# Altium PCB PCB1.PcbDoc
Units mm, origin at the board's own origin, x right, y up, seen from the top; angles counter-clockwise.
Board outline 54.1 x 17.02 mm, 2 copper layers (Top Layer, Bottom Layer); 28 components, 32 nets, 150 pads, 61 vias.
Unrouted connection lines stored in the file: 3.
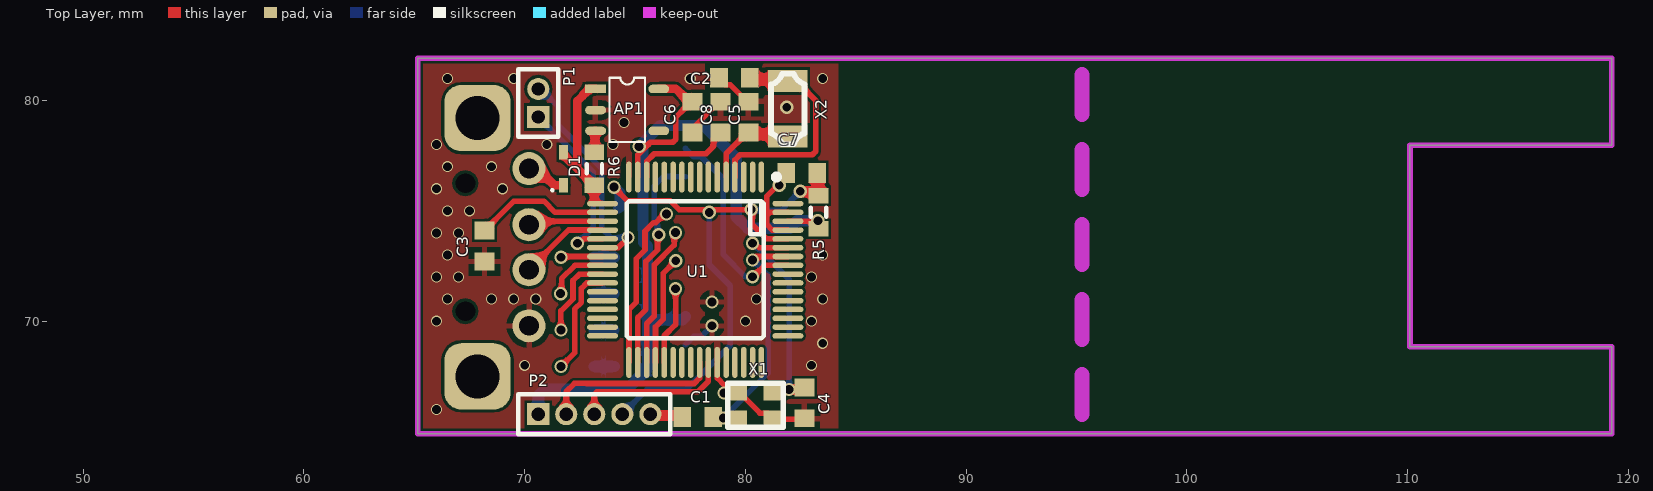
[diagram p0: Top Layer view]
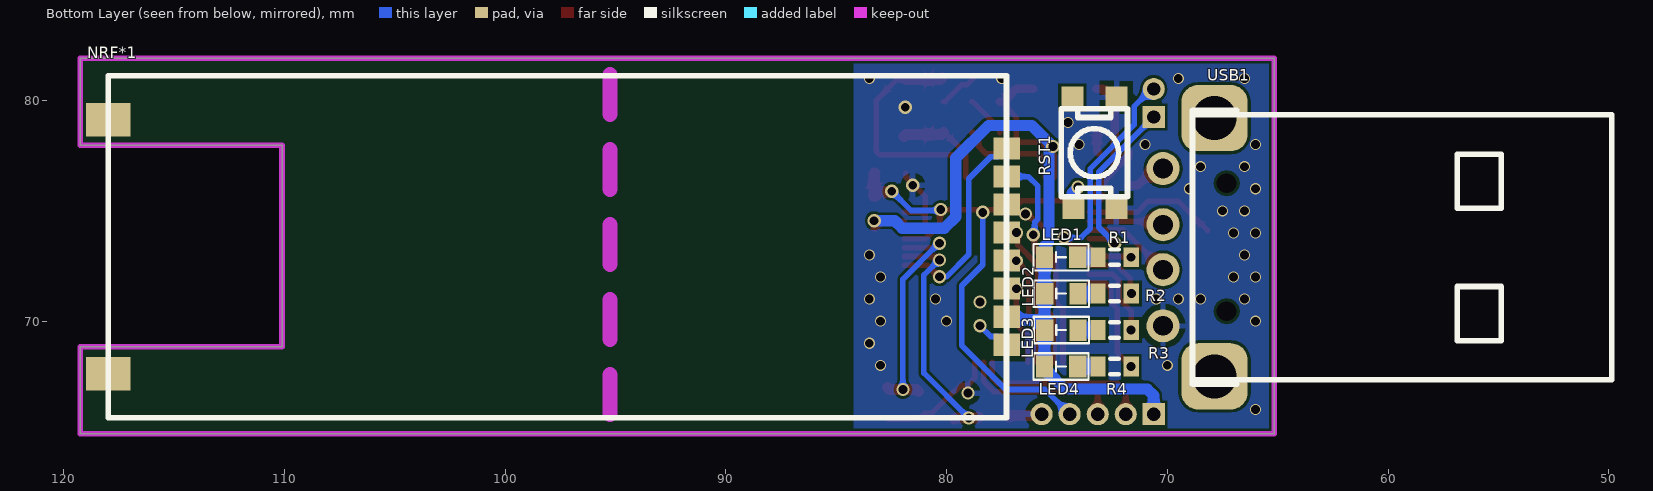
[diagram p1: Bottom Layer view, seen from below]

## Layer stack, top to bottom
Top Solder: solder mask 0.0102, Solder Resist, Dk 3.5
Top Layer: signal copper 0.0356
Dielectric 1: dielectric 0.32, FR-4, Dk 4.8
Bottom Layer: signal copper 0.0356
Bottom Solder: solder mask 0.0102, Solder Resist, Dk 3.5

## Board outline
65.151,64.897 65.151,81.915 119.253,81.915 119.253,77.978 110.109,77.978 110.109,68.834 119.253,68.834 119.253,64.897

## Design rules (kind name [scope] priority, off if disabled: settings)
Clearance [All] p1: gap=0.127 ignorepadtopadclearanceinfootprint=FALSE
PolygonConnect [All] p1: connectstyle=Relief reliefconductorwidth=0.254 reliefentries=4 polygonreliefangle="90 Angle" airgapwidth=0.254
RoutingVias [All] p1: holewidth=0.711 width=1.27 viastyle="Through Hole" minholewidth=0.4 minwidth=0.6 maxholewidth=0.711 maxwidth=1.27
SolderMaskExpansion [All] p1: expansion=0.102
Width [All] p1: maxlimit=1.016 minlimit=0.178 preferedwidth=0.254 minimp=50.000000 maximp=50.000000 favimp=50.000000
30 further rules are at their usual default settings.

## Components (designator, comment, footprint, x,y, rotation, side; value= is the part's Value field where it differs from the comment)
AP1 "AP2112" SOT-23-5 73.843,81.032 r0 top
C1 "Cap Semi" 1608[0603] 77.839,65.659 r180 top value=20pF
C2 "Cap Semi" 1608[0603] 79.502,81.026 r180 top value=20pF
C3 "Cap Semi" 1608[0603] 68.178,73.406 r90 top value=1uF
C4 "Cap Semi" 1608[0603] 82.677,66.294 r270 top value=20pF
C5 "Cap Semi" 1608[0603] 80.137,79.248 r90 top value=20pF
C6 "Cap Semi" 1608[0603] 77.597,79.248 r90 top value=1uF
C7 "Cap Semi" 1608[0603] 82.55,76.708 r0 top value=0.1uF
C8 "Cap Semi" 1608[0603] 78.867,79.248 r270 top value=1uF
D1 "Schottky" SOD-523 71.755,76.91 r90 top
LED1 "LED" SMD-0603_LED 75.565,72.898 r180 bottom
LED2 "LED" SMD-0603_LED 75.551,71.247 r180 bottom
LED3 "LED" SMD-0603_LED 75.551,69.596 r180 bottom
LED4 "LED" SMD-0603_LED 75.565,67.945 r180 bottom
NRF*1 "NRF24L01" NRF24L01_with_Antenna 77.283,65.621 r0 bottom
P1 "MHDR1X2" MHDR1X2 70.612,79.248 r90 top
P2 "MHDR1X5" MHDR1X5 70.612,65.786 r0 top
R1 "Res3" J1-0603 72.39,72.898 r180 bottom value=1K
R2 "Res3" J1-0603 72.39,71.247 r180 bottom value=1K
R3 "Res3" J1-0603 72.39,69.596 r180 bottom value=1K
R4 "Res3" J1-0603 72.39,67.945 r180 bottom value=1K
R5 "Res3" J1-0603 83.312,74.93 r90 top value=10K
R6 "Res3" J1-0603 73.152,76.91 r90 top value=100K
RST1 "SPST" "TACK-SW_SMD 2P 4x3mm_2" 74.803,79.629 r180 bottom
U1 "NUC240SE3AE" MCU_LQFP_64_7x7 77.724,72.33 r270 top
USB1 "Standard" USB_Type-A_P_Thru-Hole 49.86,67.35 r0 bottom
X1 "Xtal" 2520S 79.63,66.813 r0 top value=12M
X2 "Xtal" FC-135 80.215,79.964 r270 top value=32.768k

## Footprints (in the part's own frame and the unit in brackets; to place one, negate y for a bottom-side part, rotate by r counter-clockwise, add the part's x,y. Pads: shape width x height; smd on the part's side, far side on the other; paste and mask are expansions set on the pad)
1608[0603] [mm] "Chip Capacitor, Body 1.6x0.8mm, IPC High Density"
  rect 0.8x0.9 smd: 1(-0.7,0) 2(0.7,0)
  body extent -0.87,-0.48 0.87,0.48, height 1.3
2520S [mm]
  rect 0.9x0.8 smd: 1(0,-1.25) 2(1.65,0) ""(0,0) ""(1.65,-1.25)
  silkscreen extent -0.43,-1.63 2.07,0.37
FC-135 [mm]
  rect 1x1.8 smd: 1(-0.91,1.7) 2(1.59,1.7)
  silkscreen extent -1.24,0.94 1.94,2.46
J1-0603 [mm] "Chip Resistor, Body 1.6x0.8mm, IPC High Density"
  rect 0.7x0.9 smd: 1(-0.75,0) 2(0.75,0)
  silkscreen extent -0.2,-0.35 0.2,0.35, body extent -0.85,-0.48 0.85,0.48, height 0.9
MCU_LQFP_64_7x7 [mm]
  oval 1.4x0.25 smd: 1(-4.2,3) 2(-4.2,2.6) 3(-4.2,2.2) 4(-4.2,1.8) 5(-4.2,1.4) 6(-4.2,1) 7(-4.2,0.6) 8(-4.2,0.2) 9(-4.2,-0.2) 10(-4.2,-0.6) 11(-4.2,-1) 12(-4.2,-1.4) 13(-4.2,-1.8) 14(-4.2,-2.2) 15(-4.2,-2.6) 16(-4.2,-3) 33(4.2,-3) 34(4.2,-2.6) 35(4.2,-2.2) 36(4.2,-1.8) 37(4.2,-1.4) 38(4.2,-1) 39(4.2,-0.6) 40(4.2,-0.2) 41(4.2,0.2) 42(4.2,0.6) 43(4.2,1) 44(4.2,1.4) 45(4.2,1.8) 46(4.2,2.2) 47(4.2,2.6) 48(4.2,3)
  oval 0.25x1.4 smd: 17(-3,-4.2) 18(-2.6,-4.2) 19(-2.2,-4.2) 20(-1.8,-4.2) 21(-1.4,-4.2) 22(-1,-4.2) 23(-0.6,-4.2) 24(-0.2,-4.2) 25(0.2,-4.2) 26(0.6,-4.2) 27(1,-4.2) 28(1.4,-4.2) 29(1.8,-4.2) 30(2.2,-4.2) 31(2.6,-4.2) 32(3,-4.2) 49(3,4.2) 50(2.6,4.2) 51(2.2,4.2) 52(1.8,4.2) 53(1.4,4.2) 54(1,4.2) 55(0.6,4.2) 56(0.2,4.2) 57(-0.2,4.2) 58(-0.6,4.2) 59(-1,4.2) 60(-1.4,4.2) 61(-1.8,4.2) 62(-2.2,4.2) 63(-2.6,4.2) 64(-3,4.2)
  silkscreen extent -4.32,-3.1 3.1,3.8, body extent -3.5,-3.5 3.5,3.5, height 1.6
MHDR1X2 [mm] "Connector; Header; 2 Position"
  rect 1x1 hole 0.6: 1(0,0)
  round 1 hole 0.6: 2(1.27,0)
  silkscreen extent -0.9,-0.9 2.17,0.9
MHDR1X5 [mm] "Connector; Header; 5 Position"
  rect 1x1 hole 0.6: 1(0,0)
  round 1 hole 0.6: 2(1.27,0) 3(2.54,0) 4(3.81,0) 5(5.08,0)
  silkscreen extent -0.9,-0.9 5.98,0.9
NRF24L01_with_Antenna [mm]
  rect 1.2x1 smd: 1(0,-4.58) 2(0,-3.31) 3(0,-5.85) 4(0,-7.12) 5(0,-8.39) 6(0,-9.66) 7(0,-10.93) 8(0,-12.2)
  round 1.524 on Mech1: 1(4.44,-11.55) 2(1.9,-11.55) 3(1.9,-9.01) 4(4.44,-9.01) 5(1.9,-6.47) 6(4.44,-6.47) 7(1.9,-3.93) 8(4.44,-3.93)
  rect 2x1.524 smd: 2(40.7,-13.5) 2(40.7,-2)
  silkscreen extent 0,-15.5 40.7,0
SMD-0603_LED [mm]
  rect 0.78x0.98 smd: 1(0,0) 2(1.51,0)
  silkscreen extent -0.5,-0.6 2,0.6
SOD-523 [mm] "SODFL, 2-Leads, Body 0.80x1.60mm, IPC Medium Density"
  rect 0.65x0.4 smd: 1(-0.75,0) 2(0.75,0)
  silkscreen extent -1.02,0.45 -0.93,0.55, body extent -0.65,-0.45 0.65,0.45, height 0.65
SOT-23-5 [mm]
  rect 0.95x0.38 smd: 1(-0.63,-0.51)
  oval 0.95x0.38 smd: 2(-0.63,-1.47) 3(-0.63,-2.41) 4(2.23,-2.41) 5(2.23,-0.51)
  silkscreen extent 0,-2.91 1.61,0
"TACK-SW_SMD 2P 4x3mm_2" [mm]
  rect 1x1 smd: 1(0.5,0.5) 1(0.55,-4.5) 2(2.5,-4.5) 2(2.5,0.5)
  silkscreen extent 0,-4 3,0
USB_Type-A_P_Thru-Hole [mm]
  round 1.5 hole 0.9: 1(20.33,-9.56) 2(20.33,-7.02) 3(20.33,-4.98) 4(20.33,-2.44)
  round 0 hole 0.9: ""(17.45,-8.9) ""(17.45,-3.1)
  rrect50% 3x3 hole 2: ""(18,-11.85) ""(18,-0.15)
  silkscreen extent 0,-12.2 19,0.2

## Part data
C1 C2 C3 C4 C5 C6 C7 C8: "Capacitor (Semiconductor SIM Model)", LatestRevisionDate=29-May-2009, LatestRevisionNote="IPC-7351 Footprint Added.", PackageDescription="Chip Capacitor", PackageReference=C1206, Published=8-Jun-2000, Publisher="Altium Limited"
D1: library part Diode2
NRF*1: library part NRF24L01_module
P1: "Header, 2-Pin", LatestRevisionDate=17-Jul-2002, LatestRevisionNote="Re-released for DXP Platform.", Publisher="Altium Limited"
P2: "Header, 5-Pin", LatestRevisionDate=17-Jul-2002, LatestRevisionNote="Re-released for DXP Platform.", Publisher="Altium Limited"
R1 R2 R3 R4 R5 R6: "Resistor", LatestRevisionDate=29-May-2009, LatestRevisionNote="IPC-7351 Footprint Added.", PackageDescription="Chip Resistor", PackageReference=J1-0603, Published=8-Jun-2000, Publisher="Altium Limited"
RST1: library part Switch_Button1
USB1: library part USB1
U1: OriginalSymbolOrigin=(0,0)

## Via types
v1: diameter 0.5, hole 0.4, Top Layer to Bottom Layer, tented both sides, 34 vias
v2: diameter 0.6, hole 0.4, Top Layer to Bottom Layer, tented both sides, 27 vias

## Nets (pads, with @x,y where several pads share a name; then routed paths per layer and width w, separated by ;. In a path a pad name is that pad's centre, name@x,y a point inside that pad or via, vN(x,y) a via of type N, cw(c..) or ccw(c..) an arc to the next point about the centre after c; other vN are vias at no path point)
D12I: C4.1 U1.59 X1.2 | length 10.5
  Top Layer w0.254: v2(80.324,73.533) 80.418,73.533 80.621,73.33 U1.59
  Top Layer w0.508: X1.2 81.37,66.904 v2(81.979,66.904) 82.587,66.904 C4.1
  Bottom Layer w0.254: v2(80.324,73.533) 80.345,73.533 81.979,71.9 v2(81.979,66.904)
D12O: C1.1 U1.58 X1.1 | length 11.1
  Top Layer w0.254: v2(80.324,72.771) 80.418,72.771 80.577,72.93 U1.58
  Top Layer w0.508: C1.1 78.587,65.611 v2(78.994,65.611) 79.582,65.611 X1.1
  Bottom Layer w0.254: v2(78.994,65.611) 81.026,67.643 81.026,72.09 80.345,72.771 v2(80.324,72.771)
D+: U1.20 USB1.3 | length 4.1
  Top Layer w0.254: USB1.3 71.99,74.13 U1.20
D-: U1.19 USB1.2 | length 3.4
  Top Layer w0.254: USB1.2 70.348,74.528 73.522,74.528 U1.19
DVBUS: AP1.1 D1.2 R6.1 U1.17 | length 7
  Top Layer w0.381: D1.2 71.755,77.535 72.384,76.906 ; U1.17@73.152,75.395 R6.1 73.052,76.16 72.892,76.32 72.892,76.398 72.384,76.906 ; AP1.1 72.929,80.522 72.384,79.977 72.384,76.906
GND: AP1.2 C1.2 C2.2 C3.1 C4.2 C5.2 C6.1 C7.1 C8.1 NRF*1.2@77.283,68.931 NRF*1.2@117.983,67.621 NRF*1.2@117.983,79.121 P2.5 RST1.2 U1.16 U1.43 U1.61 U1.63 USB1.4 X1. | length 17
  Top Layer w0.254: C6.1 77.597,78.728 78.817,79.948 C8.1 ; U1.43 78.726,68.128 78.726,67.417 79.057,67.086 79.357,67.086 79.63,66.813 79.68,66.813 80.657,65.836 81.007,65.836 81.28,65.563 82.646,65.563 C4.2 ; C2.2 78.802,80.976 79.075,80.703 79.316,80.703 80.071,79.948 C5.2 ; C7.1 81.85,76.545 80.97,75.665 80.97,74.781 ; U1.61 81.922,74.132 81.211,74.132 80.97,74.373 80.97,74.781 ; U1.63 81.119,74.93 80.97,74.781
  Top Layer w0.508: P2.5 75.755,65.722 77.075,65.722 C1.2
  Bottom Layer w0.254: NRF*1.2@77.283,68.931 77.656,69.304 78,69.304 v2(78.486,69.79)
  other v1: 66,66 70,68 83,68 83.5,69 66,70 80,70 83,70 66.5,71 68.5,71 69.5,71 70.5,71 80.5,71 83.5,71 66,72 67,72 83,72 66.5,73 83.5,73 66,74 67,74 66.5,75 67.5,75 66,76 69,76 66.5,77 68.5,77 66,78 71,78 74,78 74.5,79 66.5,81 69.5,81 77.5,81 83.5,81
  other v2: 79.026,66.75 78.486,70.866 81.534,76.16 81.873,79.696
ICE_CLK: P2.3 U1.42 | length 7.2
  Top Layer w0.254: P2.3 73.152,66.675 73.272,66.795 77.839,66.795 78.322,67.278 78.322,68.128 U1.42
ICE_DAT: P2.2 U1.41 | length 8
  Top Layer w0.254: P2.2 71.882,66.813 72.252,67.183 72.807,67.183 72.814,67.176 77.681,67.176 77.922,67.417 77.922,68.128 U1.41
LED1: R1.2 U1.23 | length 1.9
  Top Layer w0.254: v2(71.64,72.898) 71.67,72.928 73.522,72.928 U1.23
LED2: R2.2 U1.24 | length 2.8
  Top Layer w0.254: v2(71.628,71.247) 71.674,71.293 71.674,71.928 72.276,72.53 U1.24
LED3: R3.2 U1.25 | length 3.9
  Top Layer w0.254: v2(71.64,69.596) 71.64,70.464 72.189,71.013 72.189,71.841 72.476,72.128 73.522,72.128 U1.25
LED4: R4.2 U1.26 | length 5
  Top Layer w0.254: v2(71.64,67.945) 72.259,68.564 72.259,70.543 72.57,70.855 72.57,71.487 72.811,71.728 73.522,71.728 U1.26
NetAP1_3: AP1.3 R6.2 | length 1
  Top Layer w0.381: R6.2 73.183,77.691 73.183,78.621 AP1.3
NetC3_2: C3.2 U1.18 | length 6.1
  Top Layer w0.254: C3.2 69.51,75.438 70.868,75.438 71.376,74.93 U1.18
NetC8_2: C8.2 U1.14 | length 4.8
  Top Layer w0.254: U1.14 75.526,76.532 75.526,77.243 75.87,77.587 78.222,77.587 78.544,77.909 78.544,78.275 78.817,78.548 C8.2
NetD1_1: D1.1 USB1.1 | length 1.9
  Top Layer w0.381: USB1.1 70.404,76.696 70.801,76.696 71.337,76.16 D1.1 D1.1@71.776,76.16
NetLED1_2: LED1.2 R1.1 | length 0.9
  Bottom Layer w0.508: R1.1 LED1.2
NetLED2_2: LED2.2 R2.1 | length 0.9
  Bottom Layer w0.508: R2.1 LED2.2
NetLED3_2: LED3.2 R3.1 | length 0.9
  Bottom Layer w0.508: R3.1 LED3.2
NetLED4_2: LED4.2 R4.1 | length 0.9
  Bottom Layer w0.508: R4.1 LED4.2
NRF_CE: NRF*1.3@77.283,71.471 U1.37 | length 3.6
  Top Layer w0.254: U1.37 76.324,69.339 76.835,69.85 v2(76.835,71.471)
NRF_IRQ: NRF*1.8@77.283,77.821 U1.57 | length 9.3
  Top Layer w0.254: v2(80.324,72.009) 80.345,72.009 80.864,72.528 81.922,72.528 U1.57
  Bottom Layer w0.254: NRF*1.8@77.283,77.821 77.656,77.448 78,77.448 78.994,76.454 78.994,73.025 80.01,72.009 v2(80.324,72.009)
RESET: C7.2 P2.4 R5.2 RST1.1 U1.60 | length 27.5
  Top Layer w0.254: v2(74.041,76.073) 74.661,75.453 76.6,75.453 76.996,75.057 78.359,75.057 v2(80.264,75.057) 80.31,75.011 80.31,74.376 80.954,73.732 81.922,73.732 U1.60
  Top Layer w0.508: v2(82.482,75.887) 82.5,75.869 83.023,75.869 83.212,75.68 R5.2 83.281,75.711 83.281,76.677 C7.2
  Bottom Layer w0.254: P2.4 75.54,66.904 77.318,66.904 79.31,68.896 79.31,71.607 78.359,72.558 v2(78.359,74.93) ; v2(80.264,75.057) 80.279,75.057 80.324,75.012 81.608,75.012 v2(82.482,75.887)
  Bottom Layer w0.508: v2(74.041,76.073) 74.313,75.801 74.313,75.189 RST1.1@74.253,75.129
SPI1_CLK: NRF*1.5@77.283,74.011 U1.35 | length 6.4
  Top Layer w0.254: U1.35 75.524,69.885 75.87,70.231 75.87,72.549 76.769,73.448 76.769,73.945 v2(76.835,74.011)
SPI1_CSN: NRF*1.4@77.283,72.741 U1.36 | length 5
  Top Layer w0.254: U1.36 75.924,69.738 76.281,70.095 76.281,72.177 v2(76.845,72.741)
SPI1_MISO: NRF*1.7@77.283,76.551 U1.34 | length 10.1
  Top Layer w0.254: U1.34 75.124,70.165 75.489,70.53 75.489,72.707 76.015,73.233 76.015,73.856 v2(76.073,73.914)
  Bottom Layer w0.254: v2(76.073,73.914) 76.007,73.98 76.007,74.48 75.865,74.621 75.865,76.119 76.297,76.551 NRF*1.7@77.283,76.551
SPI1_MOSI: NRF*1.6@77.283,75.281 U1.33 | length 7.5
  Top Layer w0.254: U1.33 74.724,70.533 75.057,70.866 75.057,72.834 75.45,73.227 75.45,74.075 75.844,74.468 75.943,74.468 76.325,74.851 v2(76.419,74.851)
UART_0_RX: P1.1 U1.21 | length 8.3
  Top Layer w0.254: v2(72.384,73.533) 72.478,73.533 72.673,73.728 73.522,73.728 U1.21
  Bottom Layer w0.254: P1.1 73.106,76.754 73.106,74.255 v2(72.384,73.533)
UART_0_TX: P1.2 U1.22 | length 10.3
  Top Layer w0.254: U1.22 73.526,73.332 74.237,73.332 74.676,73.771 v2(74.676,73.787)
  Bottom Layer w0.254: P1.2 70.717,80.518 71.501,79.734 71.501,78.898 73.487,76.912 73.487,74.212 73.912,73.787 v2(74.676,73.787)
VDD_33: AP1.5 C6.2 LED1.1 LED2.1 LED3.1 LED4.1 NRF*1.1@77.283,70.201 P2.1 R5.1 U1.15 U1.62 | length 38.8
  Top Layer w0.254: U1.15 75.126,76.532 75.126,77.539 75.692,78.105 76.708,78.105 76.835,78.232 76.835,79.236 77.42,79.821 C6.2@77.42,79.948 ; U1.62 81.926,74.528 82.864,74.528 83.212,74.18 R5.1
  Top Layer w0.381: AP1.5@76.074,80.522 76.846,80.522 77.42,79.948 C6.2
  Bottom Layer w0.508: P2.1 70.612,66.631 70.91,66.929 74.649,66.929 75.565,67.845 LED4.1 LED3.1@75.565,69.71 ; NRF*1.1@77.283,70.201 77.148,70.066 75.921,70.066 LED3.1@75.565,69.71 ; v2(83.281,74.549) 82.348,74.549 82.013,74.214 80.091,74.214 79.583,74.722 79.583,77.389 78.105,78.867 76.142,78.867 v2(75.184,77.909) 75.357,77.736 75.357,74.166 75.392,74.131 75.392,73.579 75.565,73.406 LED1.1 75.565,71.247 LED3.1@75.565,69.71
X32I: C5.1 U1.5 X2.2 | length 4.3
  Top Layer w0.254: U1.5 79.126,76.532 79.126,77.587 80.087,78.548 C5.1
  Top Layer w0.508: C5.1 80.224,78.461 81.828,78.461 X2.2
X32O: C2.1 U1.4 X2.1 | length 10.3
  Top Layer w0.254: U1.4 79.526,76.532 79.526,77.309 79.756,77.539 83.029,77.539 83.178,77.688 83.178,80.011 82.239,80.95 X2.1@81.839,80.95
  Top Layer w0.508: C2.1 80.278,80.95 X2.1@81.839,80.95
pads on no net: AP1.4 NRF*1.1@81.723,77.171 NRF*1.2@79.183,77.171 NRF*1.3@79.183,74.631 NRF*1.4@81.723,74.631 NRF*1.5@79.183,72.091 NRF*1.6@81.723,72.091 NRF*1.7@79.183,69.551 NRF*1.8@81.723,69.551 U1.1 U1.2 U1.3 U1.6 U1.7 U1.8 U1.9 U1.10 U1.11 U1.12 U1.13 U1.27 U1.28 U1.29 U1.30 U1.31 U1.32 U1.38 U1.39 U1.40 U1.44 U1.45 U1.46 U1.47 U1.48 U1.49 U1.50 U1.51 U1.52 U1.53 U1.54 U1.55 U1.56 U1.64 USB1.

## Polygon pours and split planes (outlines as drawn)
GND on Bottom Layer (solid, pour order 26): 65.151,81.915 84.201,81.915 84.201,64.897 65.151,64.897 65.151,81.915
GND on Top Layer (solid, pour order 28): 65.151,81.915 84.201,81.915 84.201,64.897 65.151,64.897 65.151,81.915

## Keep-outs
Keep-Out Layer:
  lines w0.254: 65.151,64.897 65.151,81.915 119.253,81.915 119.253,77.978 110.109,77.978 110.109,68.834 119.253,68.834 119.253,64.897 65.151,64.897
  lines w0.7: 95.25,65.773 95.25,67.573 ; 95.25,69.173 95.25,70.973 ; 95.25,72.573 95.25,74.373 ; 95.25,75.973 95.25,77.773 ; 95.25,79.373 95.25,81.173